# EAGLE board MotorBoard (EAGLE 6.5.0)
DESIGNER: AirThings Inc; REV: 1.0; SENSOR: Dual motor drive
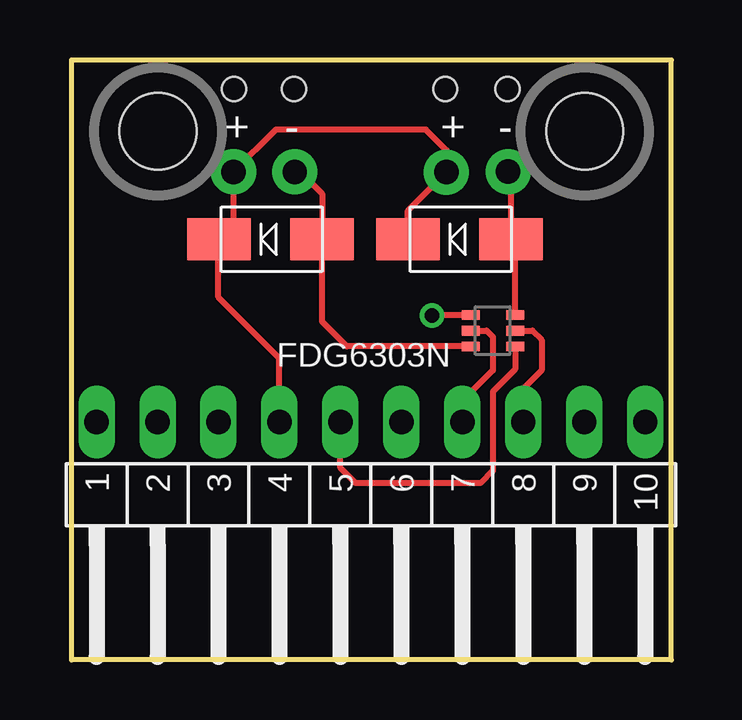
[diagram p0: board, top side]
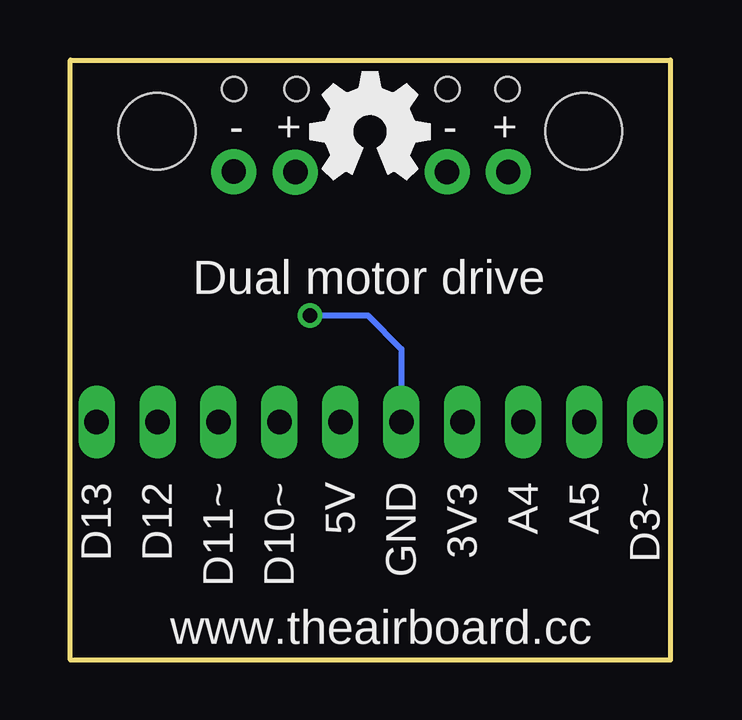
[diagram p1: board, bottom side, seen from below]

Size 25 x 25 mm. Coordinates in mm from the lower left corner, seen from the top.
Copper layers (1*16): Top 0.035mm / dielectric 1.5mm / Bottom 0.035mm
Design rules "default": minimum track width 10mil, minimum drill 24mil, track to track 8mil, track to pad 8mil, pad to pad 8mil, via to via 8mil, smd to smd 8mil, copper to edge 40mil, drill to drill 8mil, minimum pad ring 10mil, minimum via ring 8mil, stop-mask expansion 4mil, vias tented up to drill 0mil, thermal gap 10mil
Holes 1 mm at 6.78,23.79 9.28,23.79 15.58,23.79 18.18,23.79

## Footprints (pad centres in the part's own frame; a part is rotated, then mirrored left to right if it is on the bottom)
DO-214AC = smd 2.65 x 1.75: 1 0,0; 2 4.3,0
SIL10-2.54MM = drill 1.016 long: 1 11.43,0; 2 8.89,0; 3 6.35,0; 4 3.81,0; 5 1.27,0; 6 -1.27,0; 7 -3.81,0; 8 -6.35,0; 9 -8.89,0; 10 -11.43,0
1X01NS = drill 1.016 pad 1.88: 1 0,0
SC70-6 = smd 0.4 x 0.75: 1 -0.65,-0.925; 2 0,-0.925; 3 0.65,-0.925; 4 0.65,0.925; 5 0,0.925; 6 -0.65,0.925
LAYOUT25X25 = hole 3.2: 21.61,22.275; 3.83,22.275

## Placement (x,y rotation side)
D1  S1M  [DO-214AC]  18.32,17.53 180 top
D2  S1M  [DO-214AC]  10.45,17.53 180 top
FRAME1  SCH_FRAME  [BOARD_FRAME]  -71.34,-66.29 0 top  (outside the outline)
JP1  SIL  [SIL10-2.54MM]  12.48,9.91 180 top
JP2  M01SMDNS  [1X01NS]  18.2,20.35 0 top
JP3  M01SMDNS  [1X01NS]  6.76,20.34 0 top
JP4  M01SMDNS  [1X01NS]  9.3,20.34 0 top
JP5  M01SMDNS  [1X01NS]  15.62,20.33 0 top
Q1  FDG6303N  [SC70-6]  17.56,13.72 90 top
U$1  [LAYOUT25X25]  -0.22,-0.25 0 top

## Library data of the parts
D1 D2 = TheAirBoard_breakouts; DATASHEET: www.farnell.com/datasheets/1766308.pdf; DESCRIPTION: 1A, equivalent to 1N4007; FARNELL: 9843841; MANUFACTURER: FAIRCHILD; NEWARK: 58K2390; PART_NUMBER: S1M
FRAME1 U$1 = theairboard
JP1 = TheAirBoard_breakouts; DATASHEET: www.farnell.com/datasheets/8281.pdf; DESCRIPTION: Thru-hole, right angle, male, 1 row, 10-way, 2.54mm; FARNELL: 1097958; MANUFACTURER: FCI; NEWARK: 93K5133; PART_NUMBER: 77315-818-36LF
JP2-JP5 = SparkFun-Connectors
Q1 = TheAirBoard_breakouts; DATASHEET: www.farnell.com/datasheets/169519.pdf; FARNELL: 1611233; MANUFACTURER: FAIRCHILD; NEWARK: 58K1450; PART_NUMBER: FDG6303N

## Nets
GND: JP1.5 Q1.1 Q1.4
N$1: JP1.7 Q1.5
N$2: JP1.8 Q1.2
N$3: D2.1 JP4.1 Q1.6
N$4: D1.1 JP2.1 Q1.3
VCC: D1.2 D2.2 JP1.4 JP3.1 JP5.1

## Tracks (layer width: path | path; a pad name or v marks a point on that pad's centre or on a via)
GND  (via drill 0.6 pad 1.02)
  Top 0.254: Q1.1 18.48,12.11 17.56,11.18 17.56,7.88 17.05,7.37 11.85,7.37 11.21,8 JP1.5 | Q1.4 15.04,14.37 v15.02,14.36
  Bottom 0.254: v15.02,14.36 12.61,14.36 11.21,12.96 JP1.5
N$1
  Top 0.254: Q1.5 17.31,13.72 17.56,13.47 17.56,12.07 16.29,10.8 JP1.7
N$2
  Top 0.254: Q1.2 19.21,13.72 19.59,13.34 19.59,12.07 18.83,11.31 JP1.8
N$3
  Top 0.254: Q1.6 11.48,13.07 10.45,14.1 D2.1 10.45,19.43 9.54,20.34 JP4.1
N$4
  Top 0.254: Q1.3 18.48,17.37 D1.1 18.32,20.22 JP2.1
VCC
  Top 0.254: D1.2 14.02,18.73 JP5.1 15.62,21.24 14.77,22.1 8.52,22.1 JP3.1 6.76,18.14 D2.2 6.13,17.51 6.13,15.12 8.67,12.58 JP1.4

## Text on the board
tNames: + | - | + | -
bNames: + | - | + | -